# Altium PCB TASR1000.PcbDoc
Units mil, origin at the board's own origin, x right, y up, seen from the top; angles counter-clockwise.
Board outline 2362.2 x 10629.9 mil, 2 copper layers (Top Layer, Bottom Layer); 27 components, 34 nets, 145 pads, 0 vias.
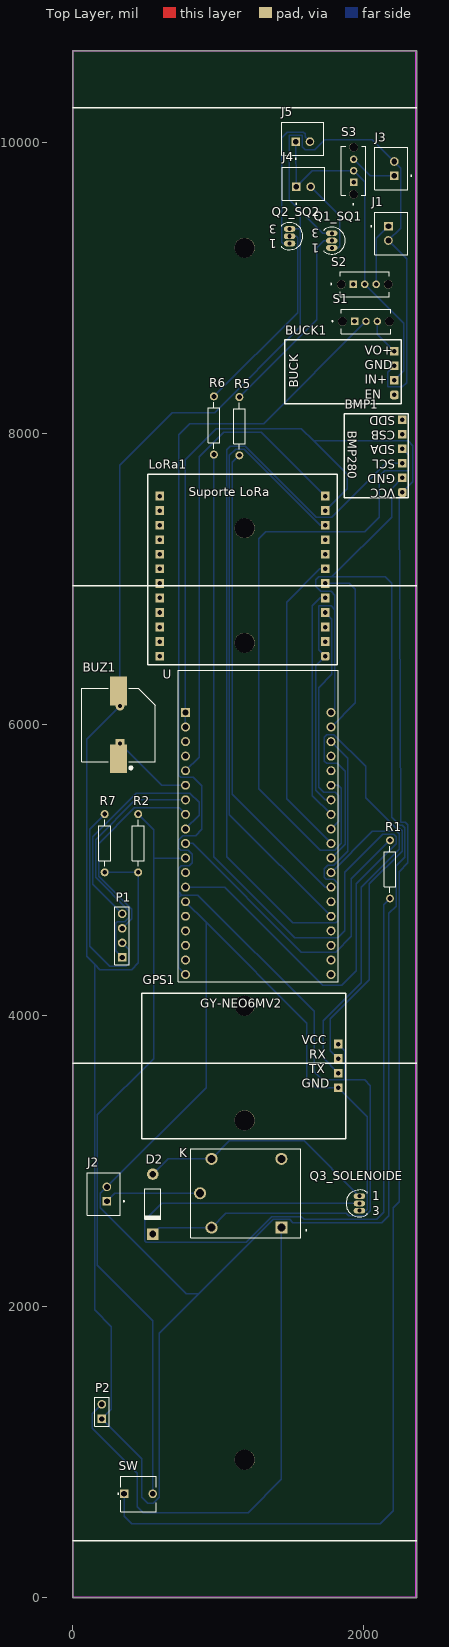
[diagram p0: Top Layer view]
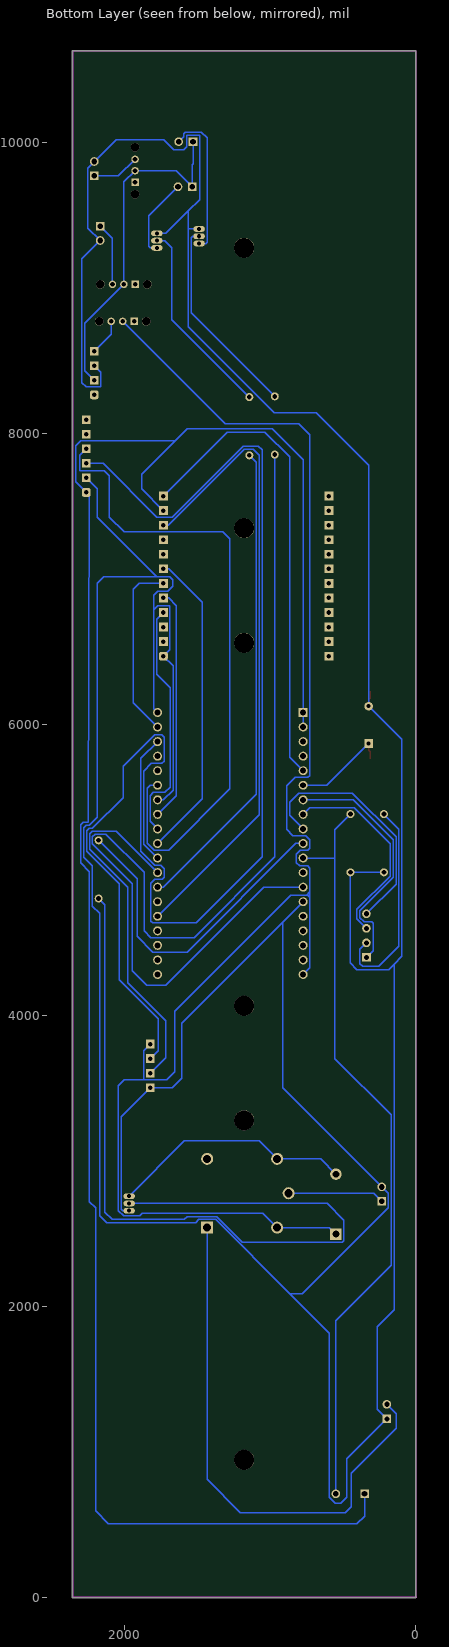
[diagram p1: Bottom Layer view, seen from below]

## Layer stack, top to bottom
Top Solder: solder mask 0.4, Solder Resist, Dk 3.5
Top Layer: signal copper 1.4
Dielectric 1: dielectric 12.6, FR-4, Dk 4.8
Bottom Layer: signal copper 1.4
Bottom Solder: solder mask 0.4, Solder Resist, Dk 3.5

## Board outline
0,0 2362.2,0 2362.2,10629.9 0,10629.9

## Design rules (kind name [scope] priority, off if disabled: settings)
Clearance [All] p1: gap=10 ignorepadtopadclearanceinfootprint=FALSE except(0: Arc-Hole Track-Hole SMDPad-Hole THPad-Hole Via-Hole Fill-Hole Poly-Hole Region-Hole Text-Hole)
PolygonConnect [All] p1: connectstyle=Relief reliefconductorwidth=10 reliefentries=4 polygonreliefangle="90 Angle" airgapwidth=10
RoomDefinition TASR1000 [InComponentClass('TASR1000')] p1: confinementstyle=ConfineIn formatcopy=TRUE lockcomponents=FALSE outline 0,0 2362.2,0 2362.2,10629.9 0,10629.9
RoutingPriority [OnLayer('Bottom Layer')] p1: routingpriority=50
RoutingTopology [All] p1: topology=Vertical
RoutingVias [All] p1: holewidth=28 width=50 viastyle="Through Hole" minholewidth=28 minwidth=50 maxholewidth=28 maxwidth=50
SolderMaskExpansion [All] p1: expansion=4
Width [All] p1: maxlimit=10 minlimit=10 preferedwidth=10
28 further rules are at their usual default settings.

## Components (designator, comment, footprint, x,y, rotation, side; value= is the part's Value field where it differs from the comment)
BMP1 "BMP280" BMP280 2265,7595 r180 top
BUCK1 "Buck" BUCK 2210,8265 r0 top
BUZ1 "Buzzer" ABSM-1574 315.55,5765.67 r90 top
D2 "Diode 1N4001" DO-41 550,2705 r270 top
GPS1 "Modulo GPS GY-NEO6MV2" GY-NEO6MV2 1825,3805 r0 top
J1 "BATERIA" JST_B2B-XH-A(LF)(SN) 2190,9375 r270 top
J2 "BATERIA2" JST_B2B-XH-A(LF)(SN) 214.33,2774.21 r90 top
J3 "BAT_ALTCOMERCIAL" JST_B2B-XH-A(LF)(SN) 2189.33,9819.21 r90 top
J4 "SQUIB" JST_B2B-XH-A(LF)(SN) 1585.79,9715.67 r0 top
J5 "SQUIB2" JST_B2B-XH-A(LF)(SN) 1580.79,10025.67 r0 top
K "1-1721150-0" RELAY_ORWH-SH-105D1F,000 1190,2780 r180 top
LoRa1 "Modulo LoRa" Suporte_Lora 597.99,7570 r0 top
P1 "Header 4" HDR1X4 340,4400 r90 top
P2 "SOLENOIDE" HDR1X2 200,1230 r90 top
Q1_SQ1 "NPN1" TO-92 1780,9325 r180 top
Q2_SQ2 "NPN1" TO-92 1490,9355 r180 top
Q3_SOLENOIDE "NPN1" TO-92 1970,2710 r0 top
R1 "Resistor de Q2_SQ2" AXIAL-0.4 2180,5005 r270 top value=10K
R2 "Resistor do header de 4 pinos" AXIAL-0.4 450,5185 r90 top value=10K
R5 "Resistor de Q1_SQ1" AXIAL-0.4 1145,8050 r90 top value=10K
R6 "Resistor de Q2_SQ2" AXIAL-0.4 970,8055 r90 top value=10K
R7 "Resistor do header de 4 pinos" AXIAL-0.4 220,5185 r90 top value=10K
S1 "CHAVE" SW_OS102011MS2QN1 2015,8770 r0 top
S2 "CHAVE_GERAL" SW_OS102011MS2QN1 2006.26,9025 r0 top
S3 "CHAVE_COMERCIAL" SW_OS102011MS2QN1 1930,9805 r90 top
SW "147694-1" TE_FSM8JRT 353,715 r0 top
U "ESP32-DEVKITC-32D" MODULE_ESP32-DEVKITC-32D 1275,5305 r0 top

## Footprints (in the part's own frame and the unit in brackets; to place one, negate y for a bottom-side part, rotate by r counter-clockwise, add the part's x,y. Pads: shape width x height; smd on the part's side, far side on the other; paste and mask are expansions set on the pad)
ABSM-1574 [mm] "Magnetic Transducer Buzzer"
  rect 5x3 smd: 1(0,0) 2(11.8,0)
  rect 1.5x1.5 hole 0.7: 1A(2.65,-0.24)
  round 1.5 hole 0.7: 2A(9.15,-0.24)
  silkscreen extent -1.83,-6.4 12.3,6.4
AXIAL-0.4 [mm] "Axial Device, Thru-Hole; 2 Leads; 0.4 in Pin Spacing"
  round 1.4 hole 0.85: 1(-5.08,0) 2(5.08,0)
  silkscreen extent -4.06,-1.02 4.06,1.02
BMP280 [mil] "BMP280 usado no projeto ASR1000."
  rrect50% 60x60 hole 31.5: 1(0,0)
  rect 60x60 hole 31.5: 2(0,-100) 3(0,-200) 4(0,-300) 5(0,-400) 6(0,-500)
  silkscreen extent -40,-540 401,38
BUCK [mil] "Buck usado no projeto ASR1000."
  rrect50% 60x60 hole 31.5: 1(0,0)
  rect 60x60 hole 31.5: 2(0,100) 3(0,200) 4(0,300)
  silkscreen extent -754,-62 46,379
DO-41 [mm] "Diode, Axial; Body 5.2 x 2.7 mm (LxDia. max), Lead Dia. 0.86 mm (max)"
  round 2 hole 1.2: 1(-5.23,0)
  rect 2x2 hole 1.2: 2(5.23,0)
  silkscreen extent -2.65,-1.4 2.75,1.4
GY-NEO6MV2 [mil] "Modulo GPS usado no projeto ASR1000."
  rect 60x60 hole 31.5: 1(0,0) 2(0,-100) 3(0,-200) 4(0,-300)
  silkscreen extent -1350,-650 50,350
HDR1X2 [mm] "Connector; Header; 2 Position"
  rect 1.5x1.5 hole 0.9: 1(0,0)
  round 1.5 hole 0.9: 2(2.54,0)
  silkscreen extent -1.27,-1.27 3.81,1.27
HDR1X4 [mm] "Connector; Header; 4 Position"
  rect 1.5x1.5 hole 0.9: 1(0,0)
  round 1.5 hole 0.9: 2(2.54,0) 3(5.08,0) 4(7.62,0)
  silkscreen extent -1.27,-1.27 8.89,1.27
JST_B2B-XH-A(LF)(SN) [mm]
  rect 1.508x1.508 hole 1: 1(-1.25,-0.525)
  round 1.508 hole 1: 2(1.25,-0.525)
  silkscreen extent -3.7,-3.6 3.7,2.88
MODULE_ESP32-DEVKITC-32D [mm]
  rect 1.56x1.56 hole 1.04: 1(-12.7,19.76)
  round 1.56 hole 1.04: 2(-12.7,17.22) 3(-12.7,14.68) 4(-12.7,12.14) 5(-12.7,9.6) 6(-12.7,7.06) 7(-12.7,4.52) 8(-12.7,1.98) 9(-12.7,-0.56) 10(-12.7,-3.1) 11(-12.7,-5.64) 12(-12.7,-8.18) 13(-12.7,-10.72) 14(-12.7,-13.26) 15(-12.7,-15.8) 16(-12.7,-18.34) 17(-12.7,-20.88) 18(-12.7,-23.42) 19(-12.7,-25.96) 20(12.7,19.76) 21(12.7,17.22) 22(12.7,14.68) 23(12.7,12.14) 24(12.7,9.6) 25(12.7,7.06) 26(12.7,4.52) 27(12.7,1.98) 28(12.7,-0.56) 29(12.7,-3.1) 30(12.7,-5.64) 31(12.7,-8.18) 32(12.7,-10.72) 33(12.7,-13.26) 34(12.7,-15.8) 35(12.7,-18.34) 36(12.7,-20.88) 37(12.7,-23.42) 38(12.7,-25.96)
  silkscreen extent -13.95,-27.25 13.95,27.15
RELAY_ORWH-SH-105D1F,000 [mm]
  rect 2.1x2.1 hole 1.4: 1(-6.2,6)
  round 2.1 hole 1.4: 2(-6.2,-6) 3(6,6) 4(8,0) 5(6,-6)
  silkscreen extent -10.61,-7.75 9.6,7.75
Suporte_Lora [mil] "Suporte do LoRa para o projeto ASR1000."
  rrect50% 60x60 hole 31.5: 1(1137.01,-1100)
  rect 60x60 hole 31.5: 2(1137.01,-1000) 3(1137.01,-900) 4(1137.01,-800) 5(1137.01,-700) 6(1137.01,-600) 7(1137.01,-500) 8(1137.01,-400) 9(1137.01,-300) 10(1137.01,-200) 11(1137.01,-100) 12(1137.01,0) 13(0,-1100) 14(0,-1000) 15(0,-900) 16(0,-800) 17(0,-700) 18(0,-600) 19(0,-500) 20(0,-400) 21(0,-300) 22(0,-200) 23(0,-100) 24(0,0)
  silkscreen extent -81,-1160 1219,151
SW_OS102011MS2QN1 [mm]
  rect 1.308x1.308 hole 0.8: 1(-2,0)
  round 1.308 hole 0.8: 2(0,0) 3(2,0)
  round 1.5 hole 1.5 unplated: ""(-4.1,0) ""(4.1,0)
  silkscreen extent -5.95,-2.15 4.3,2.15
TE_FSM8JRT [mil]
  rect 59x59 hole 39: 1(0,0)
  round 59 hole 39: 2(197,0)
  silkscreen extent -44,-122 220,122
TO-92 [mm] "TO, Flat Index; 3 In-Line, Axial Leads; Body Dia. 4.6mm; Leads 0.41 x 0.39 mm (max)"
  oval 2x1 hole 0.7: 1(0,1.27) 2(0,0) 3(0,-1.27)
  silkscreen extent -2.34,-2.34 1.35,2.34

## Part data
BMP1: "BMP280 usado no projeto ASR1000."
BUCK1: "Buck usado no projeto ASR1000."
BUZ1: "Magnetic Transducer Buzzer", ComponentLink1Description="Manufacturer Link", ComponentLink1URL=http://www.megastar.com/linecard/buzzmode/index.php, DatasheetVersion=17-Dec-2003, LatestRevisionDate=17-Dec-2003, LatestRevisionNote="Schematic revised, PCB Footprint replaced.", PackageDescription="Magnetic Transducer Buzzer", PackageReference=ABSM-1574, Published=24-Mar-1999, Publisher="Altium Limited"
D2: "1 Amp General Purpose Rectifier", Code_JEDEC=DO-204-AL, ComponentLink1Description="Manufacturer Link", ComponentLink1URL=http://www.fairchildsemi.com/, ComponentLink2Description=Datasheet, ComponentLink2URL=http://www.fairchildsemi.com/ds/1N%2F1N4001.pdf, DatasheetVersion=1998, LatestRevisionDate=17-Jul-2002, LatestRevisionNote="Re-released for DXP Platform.", PackageDescription="Diode, Axial; Body 5.2 x 2.7 mm (LxDia. max), Lead Dia. 0.86 mm (max)", PackageReference=DO-41, PackageVersion=Aug-1999, Published=8-Jun-2000, Publisher="Altium Limited"
GPS1: library part GY-NEO6MV2, "Modulo GPS utilizado no projeto ASR1000.", =GY-NEO6MV2
J1 J2 J3 J4 J5: library part B2B-XH-A(LF)(SN), "Connector Header Through Hole 2 position 0.098 _2.50mm_", Package=None, Availability=Unavailable, MF="JST Sales", MP=B2B-XH-A_LF__SN_, Price=None, SnapEDA_Link=https://www.snapeda.com/parts/B2B-XH-A%28LF%29%28SN%29/JST%20Sales%20America%20Inc./view-part/492310/?ref=snap
K: library part ORWH-SH-105D1F,000, "Electromechanical Relay 5VDC 15A SPDT __ 19.2mm 15.5mm 15mm__ THT General Purpose Relay", Package=None, Availability=Unavailable, MF="TE Connectivity", MP=ORWH-SH-105D1F,000, Price=None, SnapEDA_Link=https://www.snapeda.com/parts/ORWH-SH-105D1F%2C000/TE%20Connectivity%20Potter%20%26%20Brumfield%20Relays/view-part/573992/?ref=snap, TE_purchase_URL=https://www.te.com/usa-en/product-1-1721150-0.html?te_bu=Cor&te_type=disp&te_campaign=seda_glo_cor-seda-global-disp-prtnr-fy19-seda-model-bom-cta_sma-317_1&elqCampaignId=32493
LoRa1: library part "Suporte Lora", "LoRa usado no projeto ASR1000."
P1: "Header, 4-Pin", LatestRevisionDate=17-Jul-2002, LatestRevisionNote="Re-released for DXP Platform.", Publisher="Altium Limited"
P2: library part "Header 2", "Header, 2-Pin", LatestRevisionDate=17-Jul-2002, LatestRevisionNote="Re-released for DXP Platform.", Publisher="Altium Limited"
Q1_SQ1 Q2_SQ2 Q3_SOLENOIDE: "NPN Darlington Bipolar Transistor", Code_JEDEC=TO-92, DatasheetVersion=1989, LatestRevisionDate=17-Jul-2002, LatestRevisionNote="Re-released for DXP Platform.", PackageDescription="TO, Flat Index; 3 In-Line, Axial Leads; Body Dia. 4.6mm; Leads 0.41 x 0.39 mm (max)", PackageReference=TO-92, PackageVersion=1989, Published=8-Jun-2000, Publisher="Altium Limited"
R1 R2 R5 R6 R7: library part Res2, "Resistor", LatestRevisionDate=17-Jul-2002, LatestRevisionNote="Re-released for DXP Platform.", PackageDescription="Axial Device, Thru-Hole; 2 Leads; 0.4 in Pin Spacing", PackageReference=AXIAL-0.4, Published=8-Jun-2000, Publisher="Altium Limited"
S1 S2 S3: library part OS102011MS2QN1, "Slide Switch SPDT Through Hole", Package=None, Availability=Unavailable, MF=C&K, MP=OS102011MS2QN1, Price=None, SnapEDA_Link=https://www.snapeda.com/parts/OS102011MS2QN1/C%26K/view-part/391519/?ref=snap
SW: library part FSM8JRT, "Switch Tactile OFF _ON_ SPST Round Button PC Pins 0.05A 12VDC 1.57N Thru-Hole Radial Tape", Contact_Current_Rating="50 mA", Package=None, Availability=Unavailable, Configuration_Pole-Throw="Single Pole - Single Throw", EU_RoHS_Compliance=Compliant, MF="TE Connectivity", MP=FSM8JRT, Price=None, SnapEDA_Link=https://www.snapeda.com/parts/FSM8JRT/TE%20Connectivity%20ALCOSWITCH%20Switches/view-part/226999/?ref=snap, TE_purchase_URL=https://www.te.com/usa-en/product-147694-1.html?te_bu=Cor&te_type=disp&te_campaign=seda_glo_cor-seda-global-disp-prtnr-fy19-seda-model-bom-cta_sma-317_1&elqCampaignId=32493
U: "- Transceiver; 802.11 b/g/n _Wi-Fi, WiFi, WLAN_, Bluetooth® Smart Ready 4.x Dual Mode For Use With ESP-WROOM-32", Package=None, Availability=Unavailable, MF="Espressif Systems", MP=ESP32-DEVKITC-32D, Price=None, SnapEDA_Link=https://www.snapeda.com/parts/ESP32-DEVKITC-32D/Espressif%20Systems/view-part/2777395/?ref=snap

## Free pads (board coordinates)
  round 137.8 hole 137.8: 1(1181.1,948.82) 1(1181.1,3280.83) 1(1181.1,4068.24) 1(1181.1,6561.67) 1(1181.1,7349.07) 1(1181.1,9275.56)

## Nets (pads, with @x,y where several pads share a name; then routed paths per layer and width w, separated by ;. In a path a pad name is that pad's centre, name@x,y a point inside that pad or via, vN(x,y) a via of type N, cw(c..) or ccw(c..) an arc to the next point about the centre after c; other vN are vias at no path point)
3V3: BMP1.1 LoRa1.11 SW.1 U.1 U.2 | length 13670.2
  Bottom Layer w10: SW.1 353,562 405,510 2113,510 2201,598 2201,2679 2243,2721 2243,4990.13 2302.56,5049.69 2302.56,5311.34 2285,5328.9 2253.1,5328.9 2243,7573 BMP1.1 2338.04,7668.04 2338.04,7914.96 2304,7949 1655,7949 ; U.2 U.1 775,7820 988,8033 1571,8033 1655,7949 ; LoRa1.11 1885,7620 1885,7719 1655,7949
5: LoRa1.12 U.5 | length 3314.7
  Bottom Layer w10: U.5 868,5775.95 868,7839 1039,8010 1295,8010 LoRa1.12
5V: BUCK1.4 S1.3 | length 253.2
  Bottom Layer w10: S1.3 2093.74,8681.26 BUCK1.4
6: BUZ1.1 BUZ1.1A U.6 | length 677.1
  Top Layer w10: BUZ1.1 315.55,5813 325,5822.45 BUZ1.1A
  Bottom Layer w10: BUZ1.1A 612.05,5582.95 U.6
7: P1.1 U.7 | length 1721.1
  Bottom Layer w10: P1.1 295,4445 295,4635 305,4645 356.71,4645 385,4673.29 385,4722.44 157.44,4950 157.44,5210 430.39,5482.95 U.7
8: P1.3 U.8 | length 1420
  Bottom Layer w10: P1.3 405,4665 405,4732 177.44,4959.56 177.44,5180.44 424.56,5427.56 730.39,5427.56 U.8
9: P1.4 U.9 | length 1716.3
  Bottom Layer w10: P1.4 137,4903 137,5229.56 436.44,5529 805,5529 868,5466 868,5375.95 U.9
10: R1.1 U.10 | length 2263.7
  Bottom Layer w10: U.10 826.05,5182.95 1571.76,4437.24 1807.95,4437.24 1915,4544.29 1915,4940 R1.1
11: R2.2 SW.2 U.11 | length 5250
  Bottom Layer w10: R2.2 557,5278 557,5082.95 ; SW.2 550,1904 170,2284 170,3318 557,3705 557,5082.95 ; U.11 557,5082.95
13: R6.1 U.13 | length 7310
  Bottom Layer w10: U.13 1046.05,4882.95 1719,4210 1849,4210 1948,4309 1948,4905.44 2222.56,5180 2222.56,5230 2205,5247.56 2130.56,5247.56 1868,4985 1868,4584 1821,4537 1524,4537 970,5091 R6.1
24: LoRa1.10 U.34 | length 4348.8
  Bottom Layer w10: LoRa1.10 1701.15,7370 1178.59,7892.56 1118.56,7892.56 1077,7851 1077,5380.95 U.34
26: R5.1 U.32 | length 3290.1
  Bottom Layer w10: R5.1 1097,7802 1097,5522.84 1736.88,4882.95 U.32
27: GPS1.3 U.31 | length 2497.7
  Bottom Layer w10: U.31 2059.61,5267.56 2225,5267.56 2242.56,5250 2242.56,5142.44 1981,4880.88 1981,4227 1720,3966 1720,3710 GPS1.3
28: GPS1.2 U.30 | length 3700.8
  Bottom Layer w10: U.30 1871,5178.95 1871,5680 1818,5733 1745,5733 1729,5749 1729,5913 1745,5929 1795,5929 2012,5712 2012,5498.12 2222.56,5287.56 2245,5287.56 2262.56,5270 2262.56,5130.55 2038,4905.99 2038,4246 1771,3979 1771,3759 GPS1.2
29: LoRa1.7 U.29 | length 2145.7
  Bottom Layer w10: LoRa1.7 1697.92,7070 1469,6841.08 1469,5488.95 U.29
30: LoRa1.4 U.28 | length 1668.8
  Bottom Layer w10: LoRa1.4 1780,6725 1780,6344 1689,6253 1689,5570 1725,5534 1805,5534 1826.78,5512.22 1826.78,5334.73 U.28
31: LoRa1.5 U.27 | length 1598.4
  Bottom Layer w10: LoRa1.5 1700,6870 1645.38,6815.38 1645.38,5512.57 U.27
33: BMP1.4 U.25 | length 4496.2
  Bottom Layer w10: U.25 1825,5582.95 1846.78,5561.17 1846.78,5184.78 1799,5137 1700,5137 1279,5558 1279,7276 1328,7325 2005,7325 2106,7426 2106,7708 2143,7745 2310,7745 2310,7850 BMP1.4
36: BMP1.3 U.22 | length 6769.5
  Bottom Layer w10: U.22 1891,5766.95 1891,5129 1795,5033 1752,5033 1729,5010 1729,4950 1742,4937 1794,4937 1821,4910 1821,4650 1808,4637 1511.01,4637 1057,5091.01 1057,7887 1083,7913 1186.43,7913 1674.43,7425 1780,7425 2150,7795 BMP1.3
37: LoRa1.6 U.21 | length 1238.4
  Bottom Layer w10: LoRa1.6 1901,6970 1941,6930 1941,6148.95 U.21
B3: D2.1 K.5 Q3_SOLENOIDE.1 | length 1671.5
  Bottom Layer w10: D2.1 655.31,3016.22 K.5 1076.56,3139 1591,3139 Q3_SOLENOIDE.1
BAT2: J2.1 K.4 | length 662.8
  Bottom Layer w10: J2.1 290,2780 K.4
GND: BMP1.2 BUCK1.3 BUZ1.2 BUZ1.2A GPS1.4 J1.2 J2.2 J3.2 LoRa1.1 P2.1 Q1_SQ1.3 Q2_SQ2.3 Q3_SOLENOIDE.3 R2.1 R7.1 U.14 U.20 U.26 | length 32486.3
  Top Layer w10: BUZ1.2 315.55,6182.45 325,6173 BUZ1.2A
  Bottom Layer w10: R7.1 R2.1 450,4362 405,4317 187,4317 150,4354 ; U.14 916.57,4641.38 ; Q2_SQ2.3 1565,9405 ; U.26 1734.99,5482.95 1669,5548.95 1669,6404 LoRa1.1 1690,6515 1690,6815 1775,6815 1800,6790 ; U.20 1800,6107.95 1800,6790 ; Q1_SQ1.3 1718.89,9375 1565,9528.89 ; Q3_SOLENOIDE.3 2015,2660 2025,2670 2025,3305 GPS1.4 1674.07,3505 1609.07,3570 1609.07,3948.88 916.57,4641.38 ; BUCK1.3 2165,8420 2165,8320 2265,8320 2295,8350 2295,9200.12 J1.2 2255,9411.46 2255,9823.43 J3.2 2059.43,10019 1733.26,10019 1664.26,9950 1596.26,9950 1576.26,9970 1576.26,10049.69 1486.89,10049.69 1486.89,9607 1565,9528.89 ; BMP1.2 2191,7621 2191,7426 1780,7015 ; 150,4354 150,1978 264.53,1863.47 264.53,1294.53 P2.1 475,955 475,690 515,650 555,650 595,690 595,1818.12 866.88,2090 ; 150,4354 97,4407 97,5897.91 BUZ1.2A 325,7782 685,8142 975,8142 1565,8732 1565,9405 ; 866.88,2090 1377,2600.12 1491,2600.12 1513.12,2578 2125,2578 2173,2626 2173,4703 2223,4753 2223,5030 2282.56,5089.56 2282.56,5290 2265,5307.56 2245.44,5307.56 2191,5362 2191,6970 2146,7015 1780,7015 ; 866.88,2090 780,2090 190,2680 190,2778.43 J2.2 916.57,3505 916.57,4641.38 ; 1565,9405 1565,9528.89 ; 1780,7015 1690,7015 1670,6995 1670,6950 1705,6915 1775,6915 1800,6890 1800,6790
NetP1_2: P1.2 R7.2 | length 1445.2
  Bottom Layer w10: R7.2 117,5282 117,4477 256,4338 365,4338 385,4358 385,4455 P1.2
NetQ1_SQ1_2: Q1_SQ1.2 R5.2 | length 1370.2
  Bottom Layer w10: R5.2 1677,8782 1677,9277 1725,9325 Q1_SQ1.2
NetQ2_SQ2_2: Q2_SQ2.2 R6.2 | length 1387.3
  Bottom Layer w10: R6.2 1545,8830 1545,9345 1535,9355 Q2_SQ2.2
NetQ3_SOLENOIDE_2: Q3_SOLENOIDE.2 R1.2 | length 5584.6
  Bottom Layer w10: Q3_SOLENOIDE.2 611,2710 495,2594 495,2454 505,2444 1192,2444 1368.12,2620.12 1570.88,2620.12 1591,2600 2088,2600 2138,2650 2138,4763 R1.2
NO2: K.1 P2.2 | length 3688.8
  Bottom Layer w10: P2.2 135.47,1265.47 135.47,1165.47 445,855.94 445,626 485,586 1206,586 1434.09,814.09 K.1
PLUSLE: J1.1 S2.3 | length 434.1
  Bottom Layer w10: S2.3 2085,9339.88 J1.1
SQ1: J4.2 Q1_SQ1.1 | length 552
  Bottom Layer w10: J4.2 1835,9495 1835,9285 1825,9275 Q1_SQ1.1
SQ2: J5.2 Q2_SQ2.1 | length 1023.9
  Bottom Layer w10: Q2_SQ2.1 1445,9305 1435,9315 1435,10030 1474.69,10069.69 1585,10069.69 1596.26,10058.43 1596.26,10038.74 J5.2
VCC: D2.2 GPS1.1 K.3 S1.2 U.19 | length 10545.1
  Bottom Layer w10: D2.2 594.69,2543.78 K.3 1051,2641 1880,2641 1896,2625 2009,2625 2045,2661 2045,3520 2005,3560 1870,3560 ; U.19 729,4328.95 729,4813 ; GPS1.1 1870,3760 1870,3560 ; S1.2 1311,8066 804,8066 729,7991 729,5650 742,5637 829,5637 888,5578 888,5280 845,5237 756,5237 729,5210 729,5150 742,5137 794,5137 821,5110 821,5050 800,5029 745,5029 729,5013 729,4850 ; 729,4813 745,4829 750,4829 ; 729,4813 729,4850 ; 729,4850 750,4829 ; 750,4829 859,4829 1658,4030 1658,3615 1713,3560 1870,3560
VCC2: BUCK1.2 J4.1 J5.1 S2.2 S3.2 | length 2360.9
  Bottom Layer w10: J5.1 1531.57,9852 1536.57,9847 J4.1 1646.57,9805 S3.2 2006.26,9728.74 S2.2 2275,8756.26 2275,8430 BUCK1.2
VCC_BAT: J3.1 S3.3 | length 327.1
  Bottom Layer w10: S3.3 2043.74,9770 J3.1
pads on no net: BMP1.5 BMP1.6 BUCK1.1 K.2 LoRa1.2 LoRa1.3 LoRa1.8 LoRa1.9 LoRa1.13 LoRa1.14 LoRa1.15 LoRa1.16 LoRa1.17 LoRa1.18 LoRa1.19 LoRa1.20 LoRa1.21 LoRa1.22 LoRa1.23 LoRa1.24 S1. S1.1 S2. S2.1 S3. S3.1 U.3 U.4 U.12 U.15 U.16 U.17 U.18 U.23 U.24 U.33 U.35 U.36 U.37 U.38

## Keep-outs
Keep-Out Layer:
  lines w10: -3.9,3.82 2358.3,3.82 2358.3,10633.72 ; 0,0 0,10629.9 2362.2,10629.9

## Silkscreen, mask and mechanical layers (free items; w line width, h text height)
Top Overlay:
  lines w10: 0,393.7 2362.2,393.7 ; 0,3674.53 2362.2,3674.53 ; 0,6955.37 2362.2,6955.37 ; 0,10236.2 2362.2,10236.2

## Dimensions
-3.9,3.82 to 2358.3,3.82 on Keep-Out Layer
-3.9,3.82 to 0,10629.9 on Keep-Out Layer

## Text inside footprints (layer, text, board x,y; h text height)
BMP1: Top Overlay "VCC" at 2215,7620 h60 r180; Top Overlay "SDD" at 2215,8120 h60 r180; Top Overlay "CSB" at 2215,8020 h60 r180; Top Overlay "SDA" at 2215,7920 h60 r180; Top Overlay "GND" at 2215,7720 h60 r180; Top Overlay "SCL" at 2215,7820 h60 r180
BUCK1: Top Overlay "VO+" at 2005,8540 h60; Top Overlay "GND" at 2005,8440 h60; Top Overlay "IN+" at 2005,8340 h60; Top Overlay "EN" at 2005,8240 h60; Top Overlay "BUCK" at 1550,8315 h60 r90
GPS1: Top Overlay "GY-NEO6MV2" at 875,4055 h60; Top Overlay "VCC" at 1575,3805 h60; Top Overlay "RX" at 1625,3705 h60; Top Overlay "TX" at 1625,3605 h60; Top Overlay "GND" at 1575,3505 h60
LoRa1: Top Overlay "Suporte LoRa" at 797.99,7570 h60
Q1_SQ1: Top Overlay "1" at 1692.44,9302.95 h59.05 r180; Top Overlay "3" at 1692.44,9405.12 h59.05 r180
Q2_SQ2: Top Overlay "1" at 1402.44,9332.95 h59.05 r180; Top Overlay "3" at 1402.44,9435.12 h59.05 r180
Q3_SOLENOIDE: Top Overlay "1" at 2057.56,2732.05 h59.05; Top Overlay "3" at 2057.56,2629.88 h59.05